# EAGLE board OptronV7_PCB (EAGLE 9.5.1)
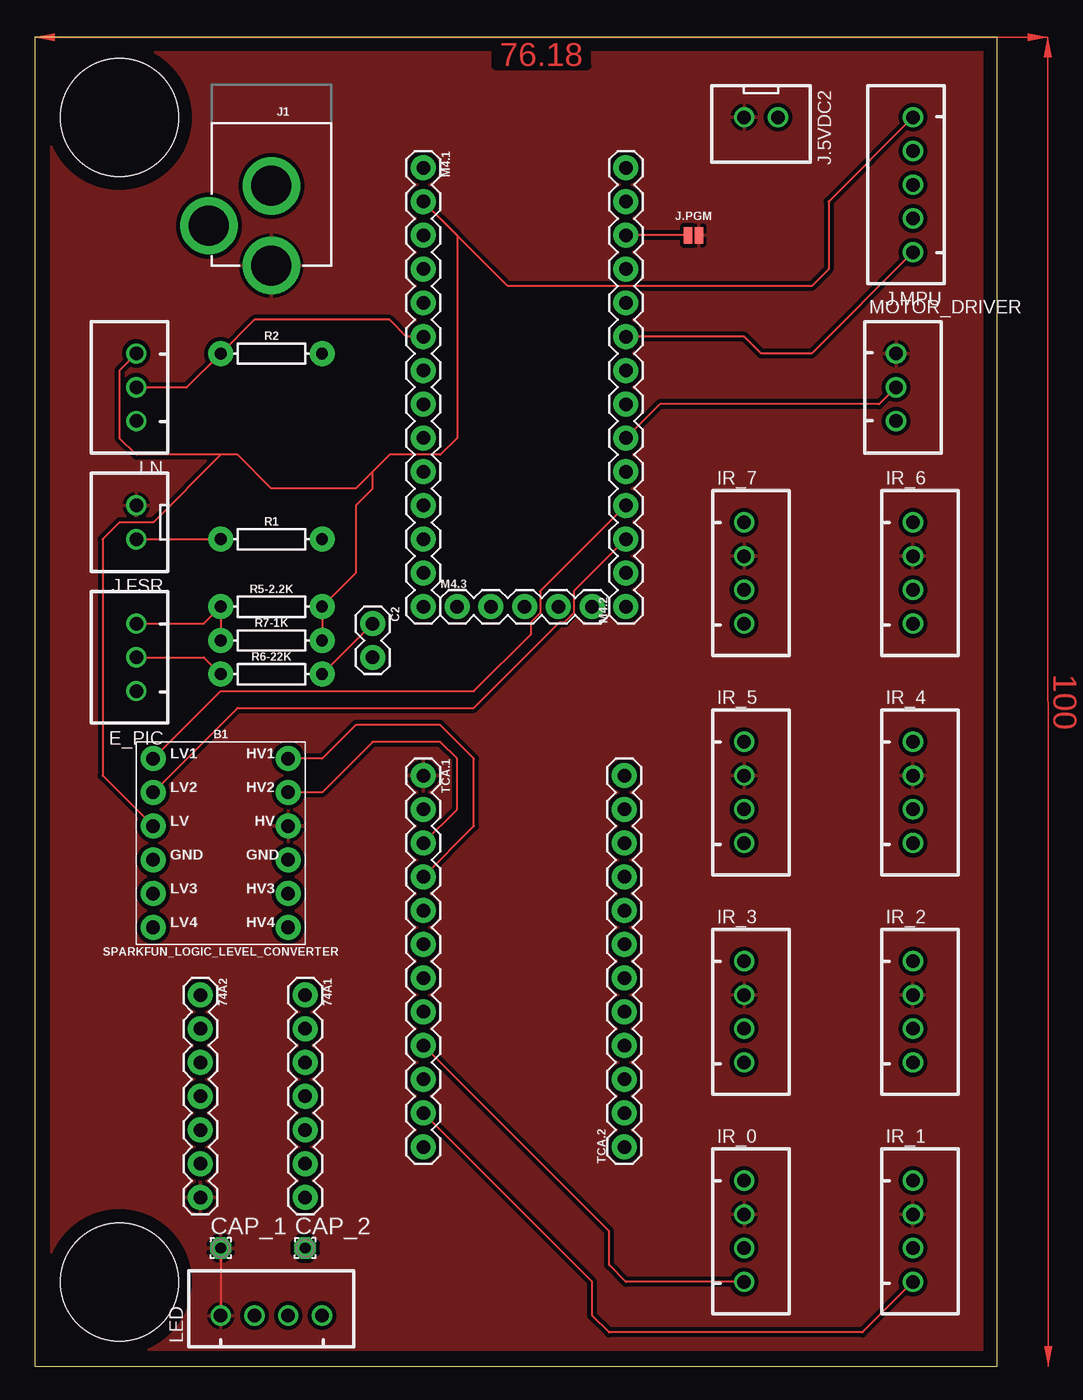
[diagram p0: board, top side]
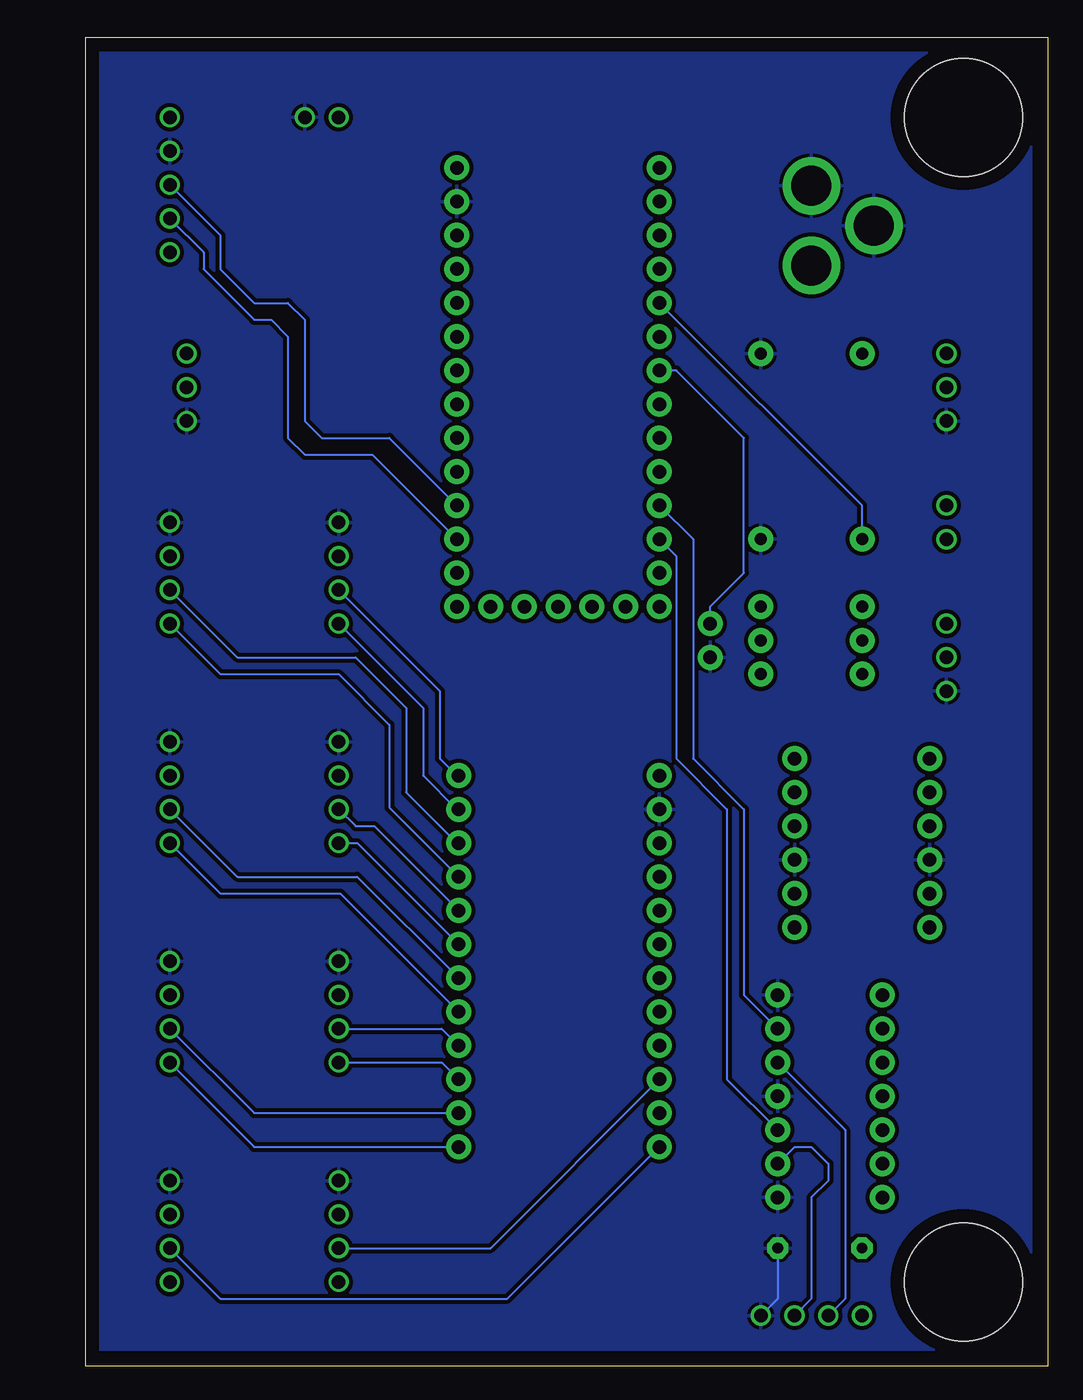
[diagram p1: board, bottom side, seen from below]

Size 72.37 x 100 mm. Coordinates in mm from the lower left corner, seen from the top.
Outline: 0,0 72.37,0 72.37,100 0,100 0,0
Copper layers (1*16): Top 0.035mm / dielectric 1.5mm / Bottom 0.035mm
Design rules "default": minimum track width 6mil, minimum drill 0.35mm, track to track 6mil, track to pad 6mil, pad to pad 6mil, via to via 6mil, smd to smd 6mil, copper to edge 40mil, drill to drill 6mil, minimum pad ring 10mil, minimum via ring 8mil, stop-mask expansion 4mil, vias tented up to drill 0mil, thermal gap 10mil
Holes 8.89 mm at 6.35,6.35 6.35,93.98

## Footprints (pad centres in the part's own frame; a part is rotated, then mirrored left to right if it is on the bottom)
1X07 = drill 1.016 pad 1.88: 1 0,0; 2 2.54,0; 3 5.08,0; 4 7.62,0; 5 10.16,0; 6 12.7,0; 7 15.24,0
SPARKFUN_LOGIC_LEVEL_CONVERTER = drill 1.016 pad 1.88: GND1 -5.08,-1.27; GND2 5.08,-1.27; HV 5.08,1.27; HV1 5.08,6.35; HV2 5.08,3.81; HV3 5.08,-3.81; HV4 5.08,-6.35; LV -5.08,1.27; LV1 -5.08,6.35; LV2 -5.08,3.81; LV3 -5.08,-3.81; LV4 -5.08,-6.35
1X02 = drill 1.016 pad 1.88: 1 0,0; 2 2.54,0
1,6/0,8 = drill 0.813 pad 1.6 octagon: 1 0,0
JST-XH-03-PACKAGE-ROUND-PAD = drill 1.016: 1 -2.54,0; 2 0,0; 3 2.54,0
JST-XH-04-PACKAGE-ROUND-PAD = drill 1.016: 1 -3.81,0; 2 -1.27,0; 3 1.27,0; 4 3.81,0
POWER_JACK_PTH = drill 2.997 pad 4.318: GND 0,7.7; GNDBREAK 4.7,10.7; PWR 0,13.7
JST-XH-02-PACKAGE-ROUND-PAD = drill 1.016: 1 -1.27,0; 2 1.27,0
JST-XH-05-PACKAGE-ROUND-PAD = drill 1.016: 1 -5.08,0; 2 -2.54,0; 3 0,0; 4 2.54,0; 5 5.08,0
SMT-JUMPER_2_NO_NO-SILK = smd 0.635 x 1.27: 1 -0.406,0; 2 0.406,0
1X14 = drill 1.016 pad 1.88: 1 0,0; 2 2.54,0; 3 5.08,0; 4 7.62,0; 5 10.16,0; 6 12.7,0; 7 15.24,0; 8 17.78,0; 9 20.32,0; 10 22.86,0; 11 25.4,0; 12 27.94,0; 13 30.48,0; 14 33.02,0
1X05 = drill 1.016 pad 1.88: 1 0,0; 2 2.54,0; 3 5.08,0; 4 7.62,0; 5 10.16,0
AXIAL-0.3 = drill 0.9 pad 1.88: P$1 -3.81,0; P$2 3.81,0
1X12 = drill 1.016 pad 1.88: 1 0,0; 2 2.54,0; 3 5.08,0; 4 7.62,0; 5 10.16,0; 6 12.7,0; 7 15.24,0; 8 17.78,0; 9 20.32,0; 10 22.86,0; 11 25.4,0; 12 27.94,0

## Placement (x,y rotation side)
74A1  [1X07]  20.32,27.94 270 top
74A2  [1X07]  12.45,27.94 270 top
B1  SPARKFUN_LOGIC_LEVEL_CONVERTER  [SPARKFUN_LOGIC_LEVEL_CONVERTER]  13.97,39.37 0 top
C2  0.1 uF  [1X02]  25.4,55.88 270 top
CAP_1  [1,6/0,8]  13.97,8.89 0 top
CAP_2  [1,6/0,8]  20.32,8.89 0 top
E_PIC  JST-XH-03-PIN-ROUND-PAD  [JST-XH-03-PACKAGE-ROUND-PAD]  7.62,53.34 90 top
IR_0  JST-XH-04-PIN-ROUND-PAD  [JST-XH-04-PACKAGE-ROUND-PAD]  53.34,10.16 270 top
IR_1  JST-XH-04-PIN-ROUND-PAD  [JST-XH-04-PACKAGE-ROUND-PAD]  66.04,10.16 270 top
IR_2  JST-XH-04-PIN-ROUND-PAD  [JST-XH-04-PACKAGE-ROUND-PAD]  66.04,26.67 270 top
IR_3  JST-XH-04-PIN-ROUND-PAD  [JST-XH-04-PACKAGE-ROUND-PAD]  53.34,26.67 270 top
IR_4  JST-XH-04-PIN-ROUND-PAD  [JST-XH-04-PACKAGE-ROUND-PAD]  66.04,43.18 270 top
IR_5  JST-XH-04-PIN-ROUND-PAD  [JST-XH-04-PACKAGE-ROUND-PAD]  53.34,43.18 270 top
IR_6  JST-XH-04-PIN-ROUND-PAD  [JST-XH-04-PACKAGE-ROUND-PAD]  66.04,59.69 270 top
IR_7  JST-XH-04-PIN-ROUND-PAD  [JST-XH-04-PACKAGE-ROUND-PAD]  53.34,59.69 270 top
J1  POWER_JACK  [POWER_JACK_PTH]  17.78,96.52 180 top
J.5VDC2  JST-XH-02-PIN-ROUND-PAD  [JST-XH-02-PACKAGE-ROUND-PAD]  54.61,93.98 180 top
J.FSR  JST-XH-02-PIN-ROUND-PAD  [JST-XH-02-PACKAGE-ROUND-PAD]  7.62,63.5 90 top
J.MPU  JST-XH-05-PIN-ROUND-PAD  [JST-XH-05-PACKAGE-ROUND-PAD]  66.04,88.9 90 top
J.PGM  JUMPER-SMT_2_NO_NO-SILK  [SMT-JUMPER_2_NO_NO-SILK]  49.53,85.09 0 top
LED  JST-XH-04-PIN-ROUND-PAD  [JST-XH-04-PACKAGE-ROUND-PAD]  17.78,3.81 0 top
LN  JST-XH-03-PIN-ROUND-PAD  [JST-XH-03-PACKAGE-ROUND-PAD]  7.62,73.66 90 top
M4.1  [1X14]  29.21,90.17 270 top
M4.2  [1X14]  44.45,57.15 90 top
M4.3  [1X05]  31.75,57.15 0 top
MOTOR_DRIVER  JST-XH-03-PIN-ROUND-PAD  [JST-XH-03-PACKAGE-ROUND-PAD]  64.77,73.66 270 top
R1  2.2k  [AXIAL-0.3]  17.78,62.23 0 top
R2  10k  [AXIAL-0.3]  17.78,76.2 0 top
R5-2.2K  [AXIAL-0.3]  17.78,57.15 0 top
R6-22K  [AXIAL-0.3]  17.78,52.07 0 top
R7-1K  [AXIAL-0.3]  17.78,54.61 0 top
TCA.1  [1X12]  29.21,44.45 270 top
TCA.2  [1X12]  44.32,16.51 90 top

## Library data of the parts
74A1 74A2 C2 M4.1-M4.3 TCA.1 TCA.2 = SparkFun-Connectors
B1 = SparkFun-Boards
CAP_1 CAP_2 = wirepad
E_PIC IR_0 IR_1-IR_7 J.5VDC2 J.FSR J.MPU LED LN MOTOR_DRIVER = Rembrandt Electronics - JST XH Connectors v1-0
J1 = SparkFun-Connectors; PROD_ID: CONN-08197
J.PGM = SparkFun-Jumpers
R1 R2 = SparkFun-Resistors; PROD_ID: RES-09435
R5-2.2K R6-22K R7-1K = SparkFun-Resistors

## Nets
3V: B1.LV J.MPU.5 LN.3 M4.1.2 R5-2.2K.P$2 R7-1K.P$2
5V: 74A2.7 B1.HV CAP_1.1 IR_0.2 IR_1.2 IR_2.2 IR_3.2 IR_4.2 IR_5.2 IR_6.2 IR_7.2 J1.PWR J.5VDC2.2 J.FSR.2 J.PGM.2 LED.1 MOTOR_DRIVER.1 TCA.1.1
A0: J.FSR.1 M4.1.5 R1.P$1
A1: LN.2 M4.1.6 R2.P$1
A2: C2.1 M4.1.7 R6-22K.P$2
A3: M4.1.8
A4: M4.1.9
A5: M4.1.10
AREF: M4.1.3
BAT: M4.2.14
CL0: IR_0.4 TCA.1.9
CL1: IR_1.4 TCA.1.11
CL2: IR_2.4 TCA.2.1
CL3: IR_3.4 TCA.2.3
CL4: IR_4.4 TCA.2.5
CL5: IR_5.4 TCA.2.7
CL6: IR_6.4 TCA.2.9
CL7: IR_7.4 TCA.2.11
D2: M4.1.14
D3: M4.3.4
D4: M4.3.5
D5: M4.2.5
D7: M4.2.6 MOTOR_DRIVER.2
D9: M4.2.7
D10: M4.2.8
D12: M4.2.10
D13: M4.2.11
DA0: IR_0.3 TCA.1.10
DA1: IR_1.3 TCA.1.12
DA2: IR_2.3 TCA.2.2
DA3: IR_3.3 TCA.2.4
DA4: IR_4.3 TCA.2.6
DA5: IR_5.3 TCA.2.8
DA6: IR_6.3 TCA.2.10
DA7: IR_7.3 TCA.2.12
EN: M4.3.1
GND: 74A1.1 74A1.4 74A1.7 B1.GND1 B1.GND2 C2.2 CAP_2.1 E_PIC.1 IR_0.1 IR_1.1 IR_2.1 IR_3.1 IR_4.1 IR_5.1 IR_6.1 IR_7.1 J1.GND J1.GNDBREAK J.5VDC2.1 J.MPU.4 LED.4 LN.1 M4.2.13 MOTOR_DRIVER.3 R1.P$2 R2.P$2 TCA.1.2
HV3: B1.HV3
HV4: B1.HV4
INT_MPU: J.MPU.1 M4.2.9
LV3: B1.LV3
LV4: B1.LV4
MI: M4.1.13
MO: 74A1.5 M4.1.12
MO5: 74A1.3 LED.2
N$2: E_PIC.3 R5-2.2K.P$1 R7-1K.P$1
N$3: E_PIC.2 R6-22K.P$1
RESET: M4.3.3
RST: M4.1.1
RX: M4.2.1
SCK: 74A1.2 M4.1.11
SCK5: 74A1.6 LED.3
SCL: B1.LV1 J.MPU.3 M4.2.4
SCL5V: B1.HV2 TCA.1.3
SDA: B1.LV2 J.MPU.2 M4.2.3
SDA5V: B1.HV1 TCA.1.4
SWD: M4.3.2
TX: M4.2.2
USB: J.PGM.1 M4.2.12
VH: M4.1.4

## Tracks (layer width: path | path; a pad name or v marks a point on that pad's centre or on a via)
3V
  Top 0.152: 25.4,67.31 26.67,68.58 30.48,68.58 31.75,69.85 31.75,85.09 M4.1.2 35.56,81.28 58.42,81.28 59.69,82.55 59.69,87.63 J.MPU.5 | 25.4,67.31 24.13,66.04 17.78,66.04 15.24,68.58 13.97,68.58 | 13.97,68.58 7.62,68.58 6.35,69.85 6.35,74.93 LN.3 | 13.97,68.58 8.89,63.5 6.35,63.5 5.08,62.23 5.08,44.45 B1.LV | 25.4,67.31 25.4,66.04 24.13,64.77 24.13,59.69 R5-2.2K.P$2 R7-1K.P$2
5V
  Top 0.152: CAP_1.1 LED.1
  pour Top (isolate 0.305): 1.27,99.06 72.39,99.06 72.39,1.27 1.27,1.27
A0
  Top 0.152: J.FSR.1 R1.P$1
  Bottom 0.152: R1.P$1 13.97,64.77 M4.1.5
A1
  Top 0.152: LN.2 11.43,73.66 R2.P$1 16.51,78.74 26.67,78.74 27.94,77.47 M4.1.6
A2
  Top 0.152: R6-22K.P$2 C2.1
  Bottom 0.152: C2.1 25.4,57.15 22.86,59.69 22.86,69.85 27.94,74.93 M4.1.7
CL0
  Top 0.152: IR_0.4 44.45,6.35 43.18,7.62 43.18,10.16 TCA.1.9
CL1
  Top 0.152: IR_1.4 62.23,2.54 43.18,2.54 41.91,3.81 41.91,6.35 TCA.1.11
CL2
  Bottom 0.152: IR_2.4 59.69,16.51 TCA.2.1
CL3
  Bottom 0.152: TCA.2.3 45.59,22.86 IR_3.4
CL4
  Bottom 0.152: IR_4.4 62.23,35.56 53.21,35.56 TCA.2.5
CL5
  Bottom 0.152: TCA.2.7 51.94,39.37 IR_5.4
CL6
  Bottom 0.152: IR_6.4 62.23,52.07 53.34,52.07 49.53,48.26 49.53,42.04 TCA.2.9
CL7
  Bottom 0.152: IR_7.4 46.99,49.53 46.99,44.45 44.45,41.91 TCA.2.11
D7
  Top 0.152: MOTOR_DRIVER.2 63.5,72.39 46.99,72.39 M4.2.6
DA0
  Bottom 0.152: IR_0.3 41.91,8.89 TCA.1.10
DA1
  Bottom 0.152: IR_1.3 62.23,5.08 40.64,5.08 TCA.1.12
DA2
  Bottom 0.152: IR_2.3 59.69,19.05 TCA.2.2
DA3
  Bottom 0.152: TCA.2.4 45.59,25.4 IR_3.3
DA4
  Bottom 0.152: IR_4.3 60.96,36.83 51.94,36.83 TCA.2.6
DA5
  Bottom 0.152: IR_5.3 52.07,40.64 50.67,40.64 TCA.2.8
DA6
  Bottom 0.152: IR_6.3 60.96,53.34 52.07,53.34 48.26,49.53 48.26,43.18 44.45,39.37 TCA.2.10
DA7
  Bottom 0.152: IR_7.3 45.72,50.8 45.72,45.72 44.45,44.45 TCA.2.12
GND
  Bottom 0.152: CAP_2.1 20.32,5.08 LED.4
  pour Bottom (isolate 0.305): 1.27,99.06 72.39,99.06 72.39,1.27 1.27,1.27
INT_MPU
  Top 0.152: M4.2.9 53.34,77.47 54.61,76.2 58.42,76.2 J.MPU.1
MO
  Bottom 0.152: M4.1.12 27.94,60.96 27.94,45.72 24.13,41.91 24.13,21.59 74A1.5
MO5
  Bottom 0.152: LED.2 15.24,5.08 15.24,17.78 74A1.3
N$2
  Top 0.152: R7-1K.P$1 R5-2.2K.P$1 12.7,55.88 E_PIC.3
N$3
  Top 0.152: E_PIC.2 12.7,53.34 R6-22K.P$1
SCK
  Bottom 0.152: M4.1.11 26.67,62.23 26.67,45.72 22.86,41.91 22.86,27.94 74A1.2
SCK5
  Bottom 0.152: LED.3 17.78,5.08 17.78,12.7 16.51,13.97 16.51,15.24 17.78,16.51 19.05,16.51 74A1.6
SCL
  Top 0.152: M4.2.4 38,58.32 38,56.67 37.31,55.98 37.31,55.09 33.02,50.8 13.97,50.8 B1.LV1
  Bottom 0.152: J.MPU.3 62.23,85.09 62.23,82.55 59.69,80.01 57.15,80.01 55.88,78.74 55.88,71.12 54.61,69.85 49.53,69.85 M4.2.4
SCL5V
  Top 0.152: TCA.1.3 31.75,41.91 31.75,45.72 30.48,46.99 25.4,46.99 21.59,43.18 B1.HV2
SDA
  Top 0.152: M4.2.3 40.54,58.32 40.54,56.67 39.85,55.98 39.47,55.98 33.02,49.53 15.24,49.53 B1.LV2
  Bottom 0.152: J.MPU.2 63.5,83.82 63.5,82.55 59.69,78.74 58.42,78.74 57.15,77.47 57.15,69.85 55.88,68.58 50.8,68.58 M4.2.3
SDA5V
  Top 0.152: TCA.1.4 33.02,40.64 33.02,45.72 30.48,48.26 24.13,48.26 21.59,45.72 B1.HV1
USB
  Top 0.152: J.PGM.1 M4.2.12
(copper drawn outside any net)
  shapes: Top area x2